# Altium PCB ECGAquisitionBoard.PcbDoc
Units mil, origin at the board's own origin, x right, y up, seen from the top; angles counter-clockwise.
Board outline 6000 x 4000 mil, 2 copper layers (Top Layer, Bottom Layer); 48 components, 29 nets, 139 pads, 0 vias.
Unrouted connection lines stored in the file: 92.
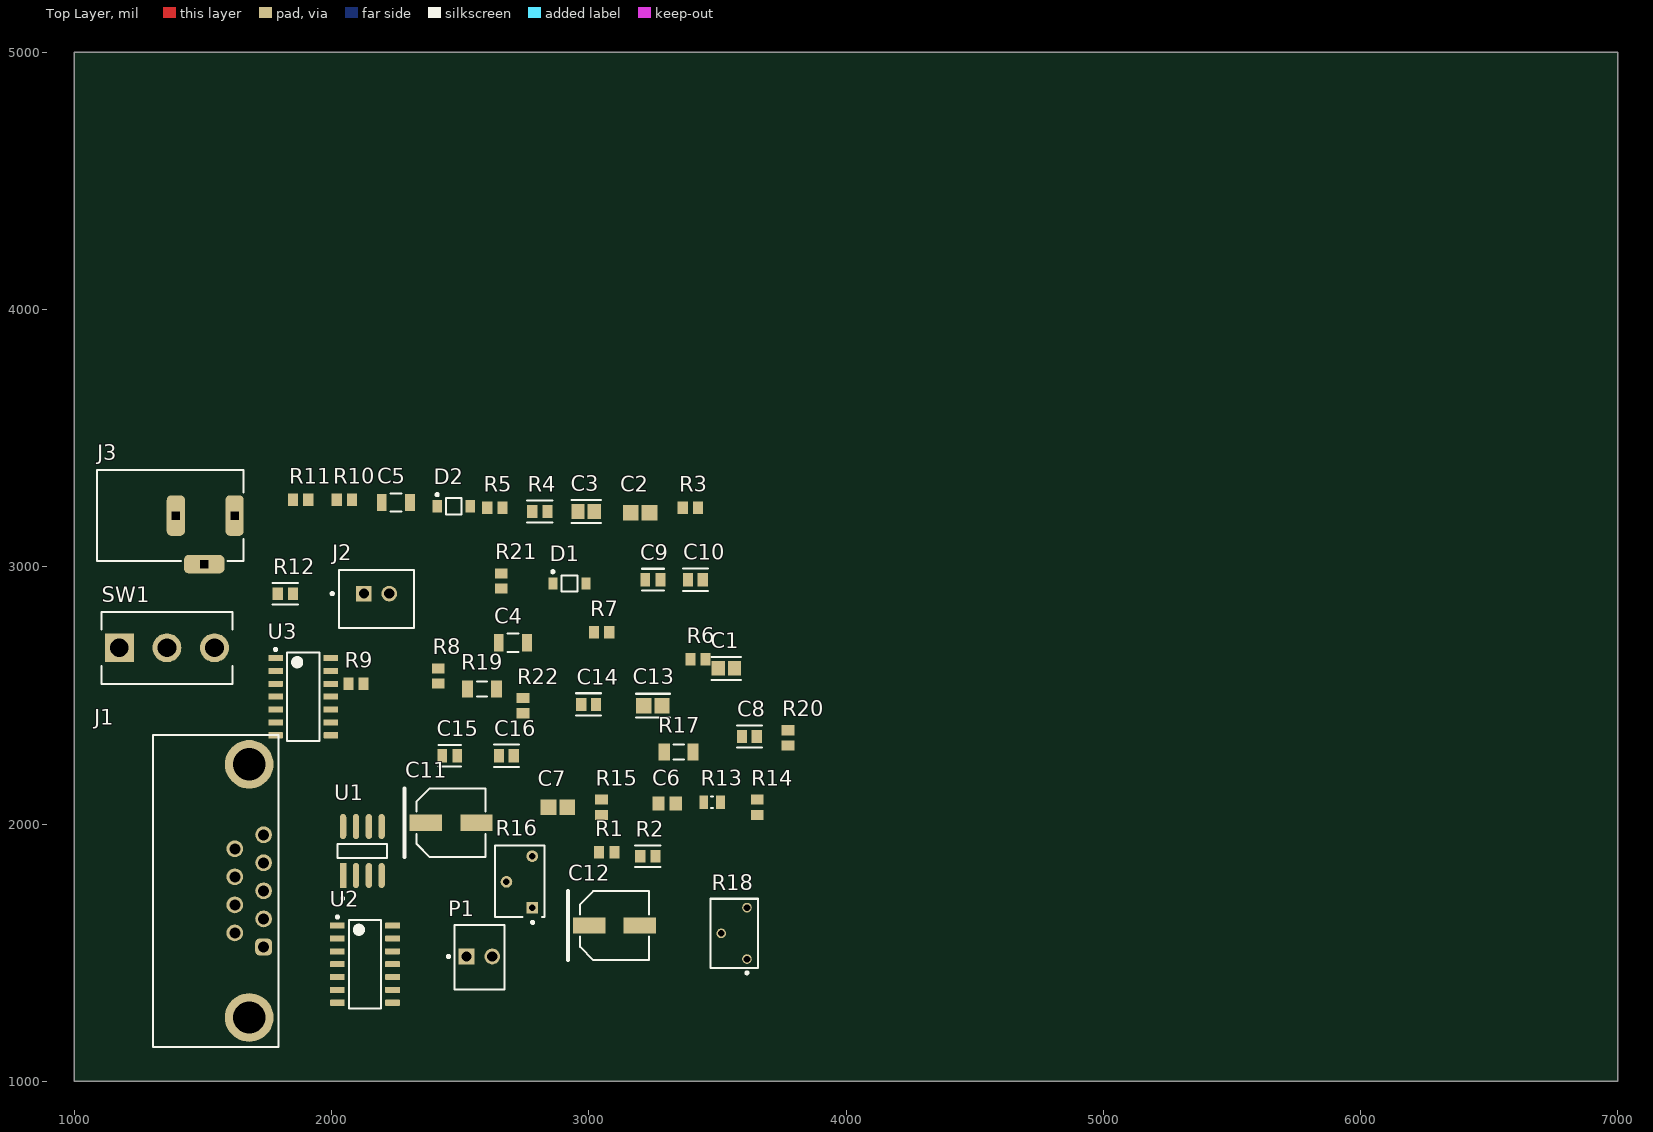
[diagram p0: Top Layer view]
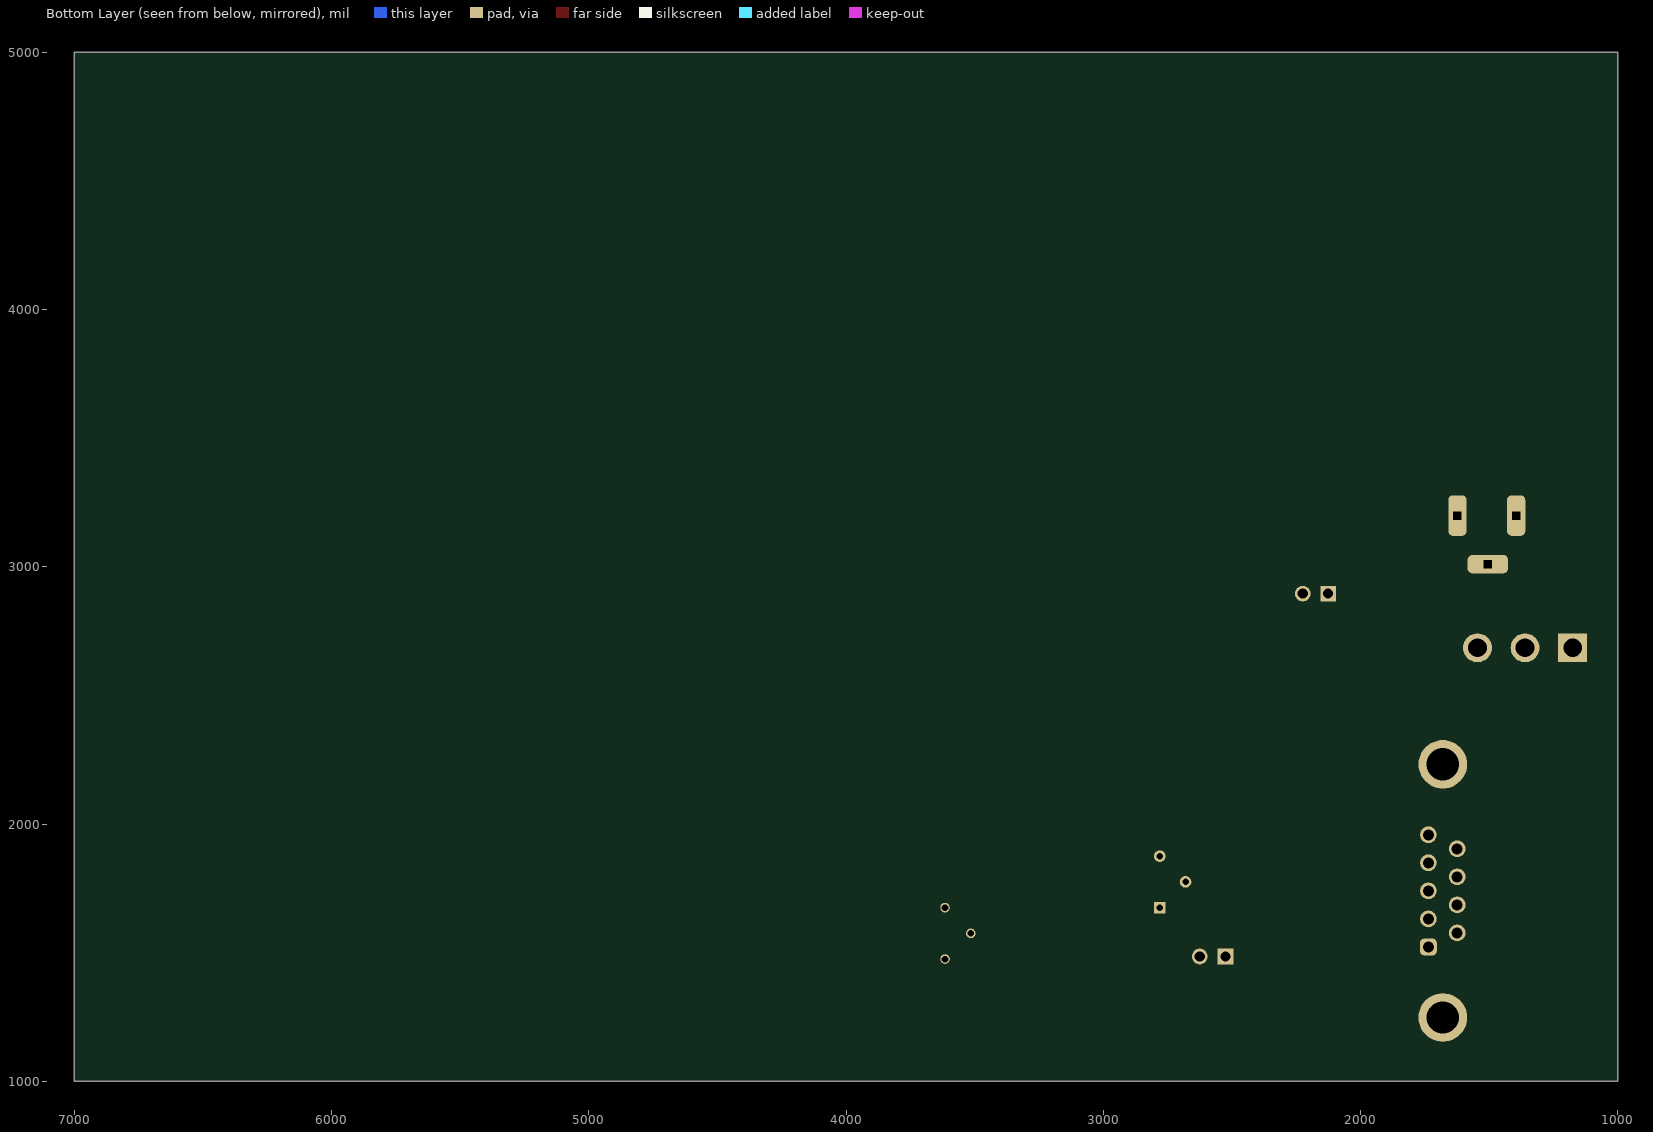
[diagram p1: Bottom Layer view, seen from below]

## Layer stack, top to bottom
Top Solder: solder mask 0.4, Solder Resist, Dk 3.5
Top Layer: signal copper 1.4
Dielectric 1: dielectric 12.6, FR-4, Dk 4.8
Bottom Layer: signal copper 1.4
Bottom Solder: solder mask 0.4, Solder Resist, Dk 3.5

## Board outline
1000,1000 7000,1000 7000,5000 1000,5000

## Design rules (kind name [scope] priority, off if disabled: settings)
Clearance [All] p1: gap=10 ignorepadtopadclearanceinfootprint=FALSE except(0: Arc-Hole Track-Hole SMDPad-Hole THPad-Hole Via-Hole Fill-Hole Poly-Hole Region-Hole Text-Hole)
PolygonConnect [All] p1: connectstyle=Relief reliefconductorwidth=10 reliefentries=4 polygonreliefangle="90 Angle" airgapwidth=10
RoomDefinition ECGAquisitionBoard [InComponentClass('ECGAquisitionBoard')] p1: confinementstyle=ConfineIn formatcopy=TRUE lockcomponents=FALSE outline 7045,1055 19870,1055 19870,2405 7045,2405
RoutingVias [All] p1: holewidth=28 width=50 viastyle="Through Hole" minholewidth=28 minwidth=50 maxholewidth=28 maxwidth=50
SolderMaskExpansion [All] p1: expansion=4 istentingtop=FALSE
Width [All] p1: maxlimit=10 minlimit=10 preferedwidth=10
30 further rules are at their usual default settings.

## Classes and differential pairs
component class ECGAquisitionBoard: C1 C2 C3 C4 C5 C6 C7 C8 C9 C11 C12 C16 D1 D2 J1 J3 P1 R1 R2 R3 R5 R7 R8 R9 R11 R12 R13 R14 R15 R16 R17 R18 R21 SW1 U1

## Components (designator, comment, footprint, x,y, rotation, side; value= is the part's Value field where it differs from the comment)
C1 "100p 1%" FP-0805-L_2_01_0_2-W_1_25-IPC_B 3535,2605 r0 top
C2 "4.7n 1%" CAPC2013X94X50ML20T25 3200,3210 r0 top
C3 "100p 1%" FP-0805-L_2_01_0_2-W_1_25-IPC_B 2990,3215 r0 top
C4 "47n 1%" FP-C1206C-EB-MFG 2705,2705 r0 top value="47,000 pF"
C5 "47n 1%" FP-C1206C-EB-MFG 2250,3250 r0 top value="47,000 pF"
C6 "2n 5% 50V" CAPC2013X70X45NL10T25 3304.53,2080 r0 top
C7 "4.7n 1%" CAPC2013X94X50ML20T25 2879.53,2065 r0 top
C8 "10u 25V" FP-GRM21B-0_15-IPC_C 3624.53,2340 r0 top
C9 "100n 25V" FP-C0805C-DN-MFG 3249.53,2950 r0 top value="0.10 μF"
C10 "10u 25V" FP-GRM21B-0_15-IPC_C 3414.53,2950 r0 top
C11 "100u 25V" PNSC-FK-V-D8_V 2465,2005 r0 top
C12 "100u 25V" PNSC-FK-V-D8_V 3100,1605 r0 top
C13 "10n 200V" FP-0805-L_2_01_0_2-W_1_25-IPC_A 3249.53,2460 r0 top
C14 "10u 25V" FP-GRM21B-0_15-IPC_C 2999.53,2465 r0 top
C15 "100n 25V" FP-C0805C-DN-MFG 2459.53,2265 r0 top value="0.10 μF"
C16 "10u 25V" FP-GRM21B-0_15-IPC_C 2679.53,2265 r0 top
D1 "3V3" ONSC-SOD-123-2-425-04_V 2925,2935 r0 top
D2 "3V3" ONSC-SOD-123-2-425-04_V 2475,3235 r0 top
J1 "618009231121" 618009231121 1550,1740 r270 top
J2 "B2B-XH-A(LF)(SN)" FP-B2B-XH-A_LF_SN-MFG 2175,2875 r0 top
J3 "694108301002" 694108301002 1373.11,3198.98 r270 top
P1 "22-23-2021" MOLX-22-23-2021_V 2575,1485 r0 top
R1 "100k 0.1%" RESC2013X60X40LL20T25_A 3070,1890 r0 top
R2 "1k 0.1%" FP-ERA6A-IPC_C 3230,1875 r0 top
R3 "10k 0.1% 0.125W" RESC2013X60X40LL20T25_A 3395,3230 r0 top
R4 "1k 0.1%" FP-ERA6A-IPC_C 2810,3215 r0 top
R5 "100k 0.1%" RESC2013X60X40LL20T25_A 2635,3230 r0 top
R6 "100k 0.1%" RESC2013X60X40LL20T25_A 3424.53,2640 r0 top
R7 "100k 0.1%" RESC2013X60X40LL20T25_A 3050,2745 r0 top
R8 "10k 0.1% 0.125W" RESC2013X60X40LL20T25_A 2415,2575.47 r90 top
R9 "100k 0.1% 0.125W" RESC2013X60X40LL20T25_A 2095,2545 r0 top
R10 "10k 0.1% 0.125W" RESC2013X60X40LL20T25_A 2050,3260 r0 top
R11 "10k 0.1% 0.125W" RESC2013X60X40LL20T25_A 1880,3260 r0 top
R12 "1k 0.1%" FP-ERA6A-IPC_C 1820.44,2895 r0 top
R13 "10M 5% 0.125W" RESC2013X50X30LL20T20 3479.53,2085 r0 top
R14 "10k 0.1% 0.125W" RESC2013X60X40LL20T25_A 3654.53,2065 r90 top
R15 "10k 0.1% 0.125W" RESC2013X60X40LL20T25_A 3049.53,2065 r90 top
R16 "10k" FP-3266W-MFG 2731.57,1777.17 r90 top value=10kΩ
R17 "1M 1% 0.125W" RESC3216X70X50NL05T20 3349.53,2280 r0 top
R18 "100k" BOUR-3266W-3_V 3565,1575 r90 top
R19 "1M 1% 0.125W" RESC3216X70X50NL05T20 2585,2525 r0 top
R20 "100k 0.1%" RESC2013X60X40LL20T25_A 3774.53,2335 r90 top
R21 "1k 0.1%" RESC2013X60X40LL20T25_A 2659.53,2945 r90 top
R22 "100k 0.1%" RESC2013X60X40LL20T25_A 2744.53,2460 r90 top
SW1 "A101SYCB04" FP-A101SYCB04-MFG 1360,2685 r90 top
U1 "AD620BRZ-RL" FP-R-8-IPC_A 2120,1895 r90 top
U2 "TL084CDR" D0014A_N 2130,1455 r0 top
U3 "TL084CDR" D0014A_N 1890,2495 r0 top

## Footprints (in the part's own frame and the unit in brackets; to place one, negate y for a bottom-side part, rotate by r counter-clockwise, add the part's x,y. Pads: shape width x height; smd on the part's side, far side on the other; paste and mask are expansions set on the pad)
618009231121 [mm] "9 pins, right angled, 8.08mm, with hex screw"
  rrect50% 1.65x1.65 hole 1.09: 1(5.54,4.72)
  round 1.65 hole 1.09: 2(2.77,4.72) 3(0,4.72) 4(-2.77,4.72) 5(-5.54,4.72) 6(4.155,1.88) 7(1.385,1.88) 8(-1.385,1.88) 9(-4.155,1.88)
  round 4.8 hole 3.2: M1(-12.5,3.3) M2(12.5,3.3)
  silkscreen extent -15.4,-6.2 15.4,6.2, body extent -15.4,-12.2 15.4,6.2, height 12.55
694108301002 [mm] "DC Power Jack Right Angled(6.4)"
  rrect50% 4x1.8 hole 0.8 square: 1(0,6.35) 2(0,0.55)
  rrect50% 1.8x4 hole 0.8 square: 3(4.8,3.35)
  silkscreen extent -4.5,-7.25 4.5,7.25, body extent -4.5,-7.25 5,7.25, height 10.75
BOUR-3266W-3_V [mm] "THD, 3-Leads, Body 6.6x4.69mm, Pitch 2.54mm"
  round 0.95 hole 0.65: 1(-2.54,-1.27) 2(0,1.27) 3(2.54,-1.27)
  silkscreen extent -4.02,-2.34 3.41,2.34, body extent -3.3,-2.35 3.3,2.35, height 8.51
CAPC2013X70X45NL10T25 [mm] "Chip Capacitor, 2-Leads, Body 2.00x1.25mm, IPC Medium Density"
  rect 1.2x1.4 smd: 1(-0.85,0) 2(0.85,0)
  body extent -1.05,-0.67 1.05,0.67, height 0.7
CAPC2013X94X50ML20T25 [mm] "Chip Capacitor, 2-Leads, Body 2.01x1.25mm, IPC Low Density"
  rect 1.55x1.55 smd: 1(-0.925,0) 2(0.925,0)
  body extent -1.1,-0.72 1.11,0.72, height 0.94
D0014A_N [mm] "SOIC, 14-Leads, Body 8.75x4mm, Pitch 1.27mm, IPC Medium Density"
  rrect17% 1.45x0.6 smd: 1(-2.725,3.81) 2(-2.725,2.54) 3(-2.725,1.27) 4(-2.725,0) 5(-2.725,-1.27) 6(-2.725,-2.54) 7(-2.725,-3.81) 8(2.725,-3.81) 9(2.725,-2.54) 10(2.725,-1.27) 11(2.725,0) 12(2.725,1.27) 13(2.725,2.54) 14(2.725,3.81)
  silkscreen extent -2.85,-4.37 1.6,4.78, body extent -3.02,-4.32 3.02,4.32, height 1.59
FP-0805-L_2_01_0_2-W_1_25-IPC_A [mil]
  rect 59.24x61.27 smd paste+0 mask+0: 1(-35.66,0) 2(35.66,0)
  silkscreen extent -65,-46 65,46, body extent -85,-50 85,50, height 10
FP-0805-L_2_01_0_2-W_1_25-IPC_B [mil]
  rect 51.36x57.33 smd paste+0 mask+0: 1(-31.72,0) 2(31.72,0)
  silkscreen extent -57,-44 57,44, body extent -67,-39 67,39, height 10
FP-3266W-MFG [mm]
  rect 1.15x1.15 hole 0.65 paste-1000 mask+0: 1(-2.595,-1.23)
  round 1.15 hole 0.65 paste-1000 mask+0: 2(-0.055,1.31) 3(2.485,-1.23)
  silkscreen extent -4.17,-2.44 3.54,2.44, body extent -3.64,-2.54 3.64,2.54, height 0.25
FP-A101SYCB04-MFG [mil]
  rect 112.37x112.37 hole 73 paste-39370.1 mask+0: 1(0,185)
  round 112.37 hole 73 paste-39370.1 mask+0: 2(0,0) 3(0,-185)
  silkscreen extent -140,-255 140,255, body extent -144,-259 144,259, height 10
FP-B2B-XH-A_LF_SN-MFG [mm]
  rect 1.55x1.55 hole 1 paste-1000 mask+0: 1(-1.25,0.525)
  round 1.55 hole 1 paste-1000 mask+0: 2(1.25,0.525)
  silkscreen extent -4.5,-2.87 3.7,2.88, body extent -3.8,-2.98 3.8,2.98, height 0.25
FP-C0805C-DN-MFG [mm]
  rect 0.95x1.35 smd paste+0 mask+0: 1(-0.75,0) 2(0.75,0)
  silkscreen extent -1.1,-1.07 1.1,1.07, body extent -1.4,-0.85 1.4,0.85, height 0.25
FP-C1206C-EB-MFG [mm]
  rect 0.95x1.7 smd paste+0 mask+0: 1(-1.4,0) 2(1.4,0)
  silkscreen extent -0.55,-0.9 0.55,0.9, body extent -2,-1 2,1, height 0.25
FP-ERA6A-IPC_C [mil]
  rect 39.55x49.69 smd paste+0 mask+0: 1(-29.56,0) 2(29.56,0)
  silkscreen extent -49,-42 49,42, body extent -53,-31 53,31, height 10
FP-GRM21B-0_15-IPC_C [mil]
  rect 39.6x51.5 smd paste+0 mask+0: 1(-28.59,0) 2(28.59,0)
  silkscreen extent -48,-43 48,43, body extent -52,-31 52,31, height 10
FP-R-8-IPC_A [mil]
  rect 97.4x24.49 smd paste+0 mask+0: 1(-95.12,75)
  rrect100% 97.4x24.49 smd paste+0 mask+0: 2(-95.12,25) 3(-95.12,-25) 4(-95.12,-75) 5(95.12,-75) 6(95.12,-25) 7(95.12,25) 8(95.12,75)
  silkscreen extent -189,-96 27,96, body extent -164,-116 164,116, height 10
MOLX-22-23-2021_V [mm] "THD, 2-Leads, Body 6.35x4.93mm, Pitch 2.54mm"
  rect 1.55x1.55 hole 1.02: 1(-1.27,0)
  round 1.55 hole 1.02: 2(1.27,0)
  silkscreen extent -3.19,-3.25 2.47,3.1, body extent -2.46,-3.25 2.46,3.1, height 10.66
ONSC-SOD-123-2-425-04_V [mm] "SOD, 2-Leads, Body 2.69x1.6mm"
  rect 0.91x1.22 smd: 1(-1.635,0) 2(1.635,0)
  silkscreen extent -1.76,-0.8 0.78,1.28, body extent -1.35,-0.8 1.35,0.8, height 1.35
PNSC-FK-V-D8_V [mm] "CAPAE, 2-Leads, Body 6.80x6.80mm"
  rect 3.2x1.6 smd: 1(-2.5,0) 2(2.5,0)
  silkscreen extent -4.6,-3.4 3.4,3.4, body extent -3.9,-3.4 3.9,3.4, height 8
RESC2013X50X30LL20T20 [mm] "Chip Resistor, 2-Leads, Body 2.00x1.25mm, IPC High Density"
  rect 0.85x1.35 smd: 1(-0.825,0) 2(0.825,0)
  silkscreen extent -0.1,-0.58 0.1,0.58, body extent -1.1,-0.72 1.1,0.72, height 0.5
RESC2013X60X40LL20T25_A [mm] "Chip Resistor, 2-Leads, Body 2.20x1.35mm, IPC High Density"
  rect 1x1.25 smd: 1(-0.75,0) 2(0.75,0)
  body extent -1.1,-0.67 1.1,0.67, height 0.6
RESC3216X70X50NL05T20 [mm] "Chip Resistor, 2-Leads, Body 3.20x1.60mm, IPC Medium Density"
  rect 1.1x1.65 smd: 1(-1.425,0) 2(1.425,0)
  silkscreen extent -0.5,-0.73 0.5,0.73, body extent -1.63,-0.82 1.62,0.82, height 0.7

## Part data
C1 C3: library part CMP-2007-04119-2, "General Purpose Ceramic Capacitor, 0805, 100pF, 1%, C0G, 30ppm/°C, 100V", Capacitance=100pF, Case Code (Imperial)=0805, Case Code (Metric)=2012, Dielectric=C0G, Dielectric Material=Ceramic, Max Operating Temperature=125°C, Min Operating Temperature=-55°C, Package Quantity=1, Tolerance=1%, Voltage=100V, Case/Package=0805, Construction=Flat, Depth=1.25mm, Height=0.71mm, Lead Free="Lead Free", Length=2.01mm, Mount="Surface Mount", Number of Pins=2, Packaging="Tape and Reel", Radiation Hardening=No, REACH SVHC="No SVHC", RoHS Compliant=Yes, Series=-, Termination=SMD/SMT, Thickness=0.037inch, Voltage Rating=100V, Voltage Rating (DC)=100V, Width=1.25mm
C2 C7: library part CMP-1036-03569-3, Manufacturer="AVX Interconnect / Elco", Part Number=08053A472FAT2A
C4 C5: library part CMP-1037-03977-2, "CAP CER 0.047UF 50V NP0 1206", Capacitance="47,000 pF", Manufacturer=KEMET, Manufacturer Part Number=C1206C473F5GACTU, Package=C1206C-EB, Temperature="-55°C to +150°C", Temperature Characteristic=C0G, Temperature Coefficient=15%, Temperature Range High=+150°C, Temperature Range Low=-55°C, Tolerance=0.01, Voltage Rating="50 V", Automotive=Yes, Automotive Grade="Grade 0", Category=Cap, ComponentLink2Description=Datasheet, ComponentLink2URL=https://content.kemet.com/datasheets/KEM_C1007_X8R_ULTRA_150C_SMD.pdf, Device Class L1="Passive Components", Device Class L2=Capacitors, Device Class L3="Ceramic Capacitors", Digikey Description="CAP CER 0.047UF 50V NP0 1206", Height=0.88mm, Ipc Land Pattern Name=CAPC320160X78, Lead Free=Yes, Material=Ceramic, Mouser Description="Multilayer Ceramic Capacitors MLCC - SMD/SMT 50volts 0.047uF 1% C0G", Octopart=https://octopart.com/c1206c473f5gactu-kemet-13140371, RoHS=TRUE
C6: library part CMP-2007-00880-1, Manufacturer=Murata, Part Number=GRM2165C1H202JA01D
C8 C10 C14 C16: library part CMP-2007-03541-2, "Chip Multilayer Ceramic Capacitors for General Purpose, 0805, 10uF, X5R, 15%, 10%, 25V", Capacitance=10uF, Case Code (Imperial)=0805, Case Code (Metric)=2012, Dielectric=X5R, Max Operating Temperature=85°C, Min Operating Temperature=-55°C, Package Quantity=1, Tolerance=10%, Voltage=25V, Case/Package=0805, Depth=1.25mm, Height=1.25mm, Lead Free="Lead Free", Length=2mm, Material=Ceramic, Mount="Surface Mount", Packaging="Tape and Reel", Radiation Hardening=No, Termination=SMD/SMT, Thickness=0.053inch, Voltage Rating=25V, Voltage Rating (DC)=25V, Width=0.049inch
C9 C15: library part CMP-2007-00282-2, "CAP CER 0.1UF 25V 20% X7R 0805", Capacitance="0.10 μF", Manufacturer=KEMET, Manufacturer Part Number=C0805C104M3RACTU, Package=C0805C-DN, Temperature="-55°C to +125°C", Temperature Characteristic=X7R, Temperature Coefficient=30ppm/°C, Temperature Range High=+125°C, Temperature Range Low=-55°C, Tolerance=0.2, Voltage Rating="25 V", Automotive=No, Category=Cap, ComponentLink2Description=Datasheet, ComponentLink2URL=https://content.kemet.com/datasheets/KEM_C1003_C0G_SMD.pdf, Device Class L1="Passive Components", Device Class L2=Capacitors, Device Class L3="Ceramic Capacitors", Digikey Description="CAP CER 0.1UF 25V 20% X7R 0805", Height=0.88mm, Ipc Land Pattern Name=CAPC200125X78, Lead Free=Yes, Material=Ceramic, Mouser Description="Multilayer Ceramic Capacitors MLCC - SMD/SMT 25volts 0.1uF X7R 20%", Octopart=https://octopart.com/c0805c104m3ractu-kemet-9138612, RoHS=TRUE
C11 C12: library part CMP-2000-06206-1, "Aluminum Electrolytic Capacitor, 100 uF, +/- 20%, 25 V, 2-Pin SMD (Size Code D8), -55 to 105 degC, RoHS, Tape and Reel", Capacitance=100µF, Case Size/Dimension=Ø6.3x7.7mm, Lifetime@Temperature=2000Hrs@105°C, Manufacturer=Panasonic, Operating Temp Range=-55to+105°C, Operating Temp-Max=105°C, Package Description="2-Pin Electrolytic Aluminum Capacitor, Body 6.6 x 6.6 mm", Package Reference=FK-V-D8, Rated Voltage=25V, Ripple Current=280mA, Datasheet URL=http://industrial.panasonic.com/cdbs/www-data/pdf/RDE0000/ABA0000C1181.pdf, Datasheet Version=03/2016, Impedance=0.34O, Manufacturer URL=http://www.panasonic.com/, Mounting Technology=SurfaceMount, Package URL=http://industrial.panasonic.com/cdbs/www-data/pdf/RDE0000/DME0000COL48.pdf, Series=FK, Type=Can
C13: library part CMP-2007-04596-2, "General Purpose Ceramic Capacitor, 0805, 10nF, 10%, X7R, 0.15, 200V", Capacitance=10nF, Case Code (Imperial)=0805, Case Code (Metric)=2012, Dielectric=X7R, Dielectric Material=Ceramic, Max Operating Temperature=125°C, Min Operating Temperature=-55°C, Package Quantity=1, Tolerance=10%, Voltage=200V, Case/Package=0805, Contact Plating=Tin, Depth=1.25mm, Dissipation Factor=2.5%, Height=0.94mm, Lead Free="Lead Free", Lead Pitch=5.08mm, Length=2.01mm, Mount="Surface Mount", Number of Pins=2, Packaging="Tape and Reel", Radiation Hardening=No, REACH SVHC="No SVHC", RoHS Compliant=Yes, Termination=SMD/SMT, Thickness=0.037inch, Voltage Rating=200V, Voltage Rating (DC)=200V, Width=0.049inch
D1 D2: library part CMP-1060-00363-1, "Zener Voltage Regulator, 500 mW, 2-Pin SOD-123, Pb-Free, Tape and Reel", Manufacturer="On Semiconductor", PartNumber=MMSZ5226BT1G, ComponentLink1Description="Manufacturer URL", ComponentLink1URL=http://www.onsemi.com/, ComponentLink2Description=Datasheet, ComponentLink2URL=http://www.onsemi.com/pub_link/Collateral/MMSZ5221BT1-D.PDF, ComponentLink3Description="Package Specification", ComponentLink3URL=http://www.onsemi.com/pub_link/Collateral/425-04.PDF, DatasheetVersion="Rev. 12", Mounting Technology="Surface Mount", P Max (W)=0.5, PackageDescription="2-Pin SOD, Body 1.6 x 2.69 mm", PackageReference=SOD-123-2-425-04, PackageVersion="Rev. G, 10/2009", Packing="Tape and Reel", RoHS=Pb-Free, VZ Typ (V)=3.3
J1: library part CMP-1502-00200-2, Contact Resistance=30mΩ, Current Rating=3A, Insulation Resistance=5GΩ, Max Operating Temperature=105°C, Min Operating Temperature=-55°C, Operating Supply Voltage=125V, Contact Material="Gold, Nickel", Contact Plating=Gold, Depth=18.5mm, Gender=Female, Height=12.7mm, Housing Material=Steel, Insulation Material=PBT, Length=30.8mm, Mount="Through Hole", NexarPartId=18818187, Number of Contacts=9, Number of Pins=9, Number of Rows=2, Orientation="Right Angle", Pitch=2.77mm, REACH SVHC=Unknown, RoHS=Compliant, Termination=SMD/SMT, Voltage Rating=125V, Width=12.5mm
J2: library part CMP-2000-05888-3, "CONN HEADER VERT 2POS 2.5MM", Color=Natural, Contact Resistance=20mR, Current Rating=3A, Housing Color=White, Insulation Resistance=1GR, Max Operating Temperature=85°C, Max Voltage Rating (AC)=250V, Min Operating Temperature=-25°C, Connector Type="Male Pin", Contact Material=Brass, Contact Plating=Tin, Contact Type="Male Pin", Depth=5.75mm, Fastening Type=Detent, Housing Material=Polyamide, Lead Free="Lead Free", Lead Pitch=2.5mm, Length=7.4mm, Max Current Rating=3A, Max Voltage Rating (DC)=250V, Mount="Through Hole", Number of Contacts=2, Number of Positions=2, Number of Rows=1, Orientation=Straight, Packaging=Bulk, Pitch=2.5mm, REACH SVHC="No SVHC", Series=XH, Termination=Solder, Voltage Rating=250V, Voltage Rating (AC)=250V, Wire/Cable Gauge=22AWG
J3: library part CMP-1502-00190-3, Color=Black, Current Rating=5A, Flammability Rating="UL94 V-0", Insulation Resistance=100MΩ, Max Operating Temperature=85°C, Min Operating Temperature=-40°C, Operating Supply Voltage=24V, Voltage Rating (DC)=20V, Connector Type=Power, Contact Gender=Female, Contact Material="Gold, Tin", Contact Plating=Tin, Gender=Male, Height=11mm, Housing Material=Polyamide, Mount="Through Hole", NexarPartId=52676102, Number of Contacts=3, Packaging=Bulk, REACH SVHC=Unknown, RoHS=Compliant, Shielding=Unshielded, Termination="Through Hole", Voltage Rating=24V
P1: library part CMP-1704-00001-3, "Male Header, Pitch 2.54 mm, 1 x 2 Position, Height 10.67 mm, Tail Length 3.56 mm, 0 to 75 degC, RoHS, Bulk", Max Operating Temperature="75 degC", Min Operating Temperature="0 degC", Package Quantity=3000, ComponentLink1Description="Manufacturer URL", ComponentLink1URL=http://www.molex.com/, ComponentLink2Description=Datasheet, ComponentLink2URL=https://datasheet.ciiva.com/19454/232266-19454304.pdf, Height="10.67 mm", Length="5.08 mm", Mount="Through Hole", Mounting Technology="Through Hole", PackageDescription="Male Header, Pitch 2.54 mm, 1 x 2 Position, Height 10.67 mm, Tail Length 3.56 mm", Packaging=Bulk, PartNumber=22-23-2021, Pins=2, Radiation Hardening=No, REACH SVHC=Unknown, RoHSCompliant=True, Width="6.35 mm"
R1 R3 R5 R6 R7 R8 R9 R10 R11 R14 R15 R20 R21 R22: library part CMP-2001-00582-2, "Metal Film Chip Resistor, High Reliability Type, 0.125 W, +/- 0.1%, -55 to 155 degC, 0805 (2012 Metric), RoHS, Tape and Reel", Case Code - in=0805, Case Code - mm=2012, Manufacturer=Panasonic, Operating Temperature Range=-55Cto+155C, Package / Case=0805(2012metric), Package Description="2-Pin Surface Mount Device, Body 2 x 1.25 mm", Power Rating=125mW(1/8W), Resistance=10kOhms, Temperature Coefficient=25PPM/C, Tolerance=0.1%, Voltage Rating=100V, Brand=Panasonic, Datasheet URL=https://industrial.panasonic.com/cdbs/www-data/pdf/RDM0000/AOA0000C307.pdf, Datasheet Version=02/2016, Factory Pack Quantity=5000, Height=0.5mm, Length=2mm, Manufacturer URL=http://www.panasonic.com/, Mounting Technology=SurfaceMount, Package Reference=0805, Packaging=Reel, Product=ThinFilmResistorsSMD, Product Category=ThinFilmResistors-SMD, RoHS=Details, Series=ERA-6A, Termination Style=SMD/SMT, Type=MetalFilmChipResistors, Width=1.25mm
R2 R4 R12: library part CMP-2001-00581-2, "RES 1K OHM 0.1% 1/8W 0805", Case Code (Imperial)=0805, Case Code (Metric)=2012, Max Operating Temperature=155°C, Max Power Dissipation=125mW, Min Operating Temperature=-55°C, Package Quantity=5000, Resistance=1kR, Resistance Tolerance=0.1%, Resistor Type="Thin Film", Temperature Coefficient=25ppm/°C, Voltage Rating=100V, Case/Package=0805, Construction=Rectangular, Contact Plating=Tin, Depth=1.25mm, Height=0.5mm, Length=2mm, Military Standard=Not, Mount="Surface Mount", Number of Pins=2, Number of Terminations=2, Packaging="Tape and Reel", Power Rating=125mW, Radiation Hardening=No, REACH SVHC="No SVHC", RoHS Compliant=Yes, Series=ERA-6A, Technology="THIN FILM", Termination=SMD/SMT, Tolerance=0.1%, Width=1.25mm, Working Voltage=100V
R13: library part CMP-2001-04285-1, Manufacturer="Vishay Dale", Part Number=CRCW080510M0JNEA
R16: library part CMP-07234-000016-1, "TRIMMER 10K OHM 0.25W PC PIN TOP", Manufacturer=Bourns, Manufacturer Part Number=3266W-1-103LF, Package=3266W, Power Rating=0.25W, Resistance=10kΩ, Temperature="-55°C to +125°C", Temperature Coefficient=100ppm/°C, Temperature Range High=+125°C, Temperature Range Low=-55°C, Tolerance=10%, Automotive=No, Category=Res, ComponentLink2Description=Datasheet, ComponentLink2URL=https://www.bourns.com/docs/Product-Datasheets/3266.pdf, Composition=Cermet, Device Class L1="Passive Components", Device Class L2=Resistors, Device Class L3="Variable Resistors and Potentiometers", Digikey Description="TRIMMER 10K OHM 0.25W PC PIN TOP", Height=9.02mm, Lead Free=Yes, Mouser Description="Trimmer Resistors - Through Hole 1/4 10Kohms 10% SQ W/Standoff Sealed", Octopart=https://octopart.com/3266w-1-103lf-bourns-81445, RoHS=TRUE, Series=3266, Standoff Height=0.43mm
R17 R19: library part CMP-2003-00020-1, Manufacturer=Panasonic, Part Number=ERJ-8ENF1004V
R18: library part CMP-0975-00021-1, "Square Trimpot Trimming Potentiometer, 100 KOhm, 0.25 W, -55 to 125 degC, 3-Pin THD, RoHS, Tube", Manufacturer=Bourns, Operating Temperature="-55 to 125 degC", PartNumber=3266W-1-104LF, Power Rating@70 degC="0.25 W", Resistance="100 kOhm", Tolerance=+/-10%, ComponentLink1Description="Manufacturer URL", ComponentLink1URL=https://www.bourns.com/, ComponentLink2Description=Datasheet, ComponentLink2URL=https://www.bourns.com/data/global/pdfs/3266.pdf, ComponentLink3Description="Package Specification", ComponentLink3URL=https://www.bourns.com/data/global/pdfs/3266.pdf, DatasheetVersion=Apr-14, Mounting Technology="Through Hole", PackageDescription="3-Pin THD, Body 6.35 x 4.31 mm, Pitch 2.54 mm", Packing=Tube, RoHS=TRUE
SW1: library part CMP-03408-000017-1, "SWITCH TOGGLE SPDT 0.4VA 20V", Actuator Color=Chrome, Contact Current Rating=400mA, Contact Resistance=10mR, Flammability Rating="UL94 V-1", Insulation Resistance=30MR, Max Operating Temperature=85°C, Max Voltage Rating (AC)=20V, Min Operating Temperature=-30°C, Package Quantity=100, Power Rating=400mW, Actuator Length=10.41mm, Actuator Material=Phenolic, Actuator Type="Standard Round", Contact Material=Copper, Contact Plating=Gold, Depth=6.86mm, Electrical Life=6000Cycles, ELV=Compliant, Illumination Type=Non-Illuminated, Lead Free="Lead Free", Max Voltage Rating (DC)=20V, Mount=Panel, Number of Poles=1, Number of Positions=2, Orientation=Straight, Packaging=Bulk, Radiation Hardening=No, REACH SVHC="No SVHC", RoHS Compliant=Yes, Series="Gemini A", Switch Function=On-On, Termination="PC Pins", Throw Configuration=SPDT, Voltage Rating (AC)=20V, Voltage Rating (DC)=20V
U1: library part CMP-09116-000146-1, "IC INST AMP 1 CIRCUIT 8SOIC", Case/Package=SOIC, Input Bias Current=1nA, Input Offset Voltage (Vos)=30mV, Input Resistance=10GR, Max Dual Supply Voltage=18V, Max Operating Temperature=125°C, Max Power Dissipation=650mW, Min Dual Supply Voltage=2.3V, Min Operating Temperature=-55°C, Min Supply Voltage=4.6V, Nominal Supply Current=1.3mA, Output Current per Channel=18mA, Package Quantity=2500, -3db Bandwidth=1MHz, Amplifier Type="INSTRUMENTATION AMPLIFIER", Common Mode Rejection Ratio=93dB, Contact Plating=Tin, Lead Free="Contains Lead", Mount="Surface Mount", Number of Channels=1, Number of Circuits=1, Number of Elements=1, Number of Pins=8, Operating Supply Current=1.3mA, Operating Supply Voltage=18V, Packaging="Tape and Reel", Power Dissipation=650mW, Radiation Hardening=No, RoHS Compliant=Yes, Series=-, Slew Rate=1.2V/µs
U2 U3: library part CMP-0017-00129-2, "JFET-Input Operational Amplifier, 7 to 36 V, 0 to 70 degC, 14-pin SOIC (D14), Green (RoHS & no Sb/Br)", Manufacturer="Texas Instruments", Rating=Catalog, Total Supply Voltage(Max)(+5V is 5, +/-5V is 10)=36, Total Supply Voltage(Min)(+5V is 5, +/-5V is 10)=7, CMRR(Min)(dB)=70, Code_JEDEC=MS-012, ComponentLink1Description="Manufacturer URL", ComponentLink1URL=http://www.ti.com/, ComponentLink2Description=Datasheet, ComponentLink2URL=http://www.ti.com/lit/ds/symlink/tl084.pdf, ComponentLink3Description="Package Specification", ComponentLink3URL=http://www.ti.com/lit/ml/mpds177g/mpds177g.pdf, DatasheetVersion=SLOS081G, Eco-Plan="Green (RoHS & no Sb/Br)", GBW(Typ)(MHz)=3, IIB(Max)(pA)=400, Iq per channel(Max)(mA)=2.8, Mounting Technology="Surface Mount", Number of Channels=4, Offset Drift(Typ)(uV/C)=18, PackageDescription="14-Pin Plastic Small Outline, Body 8.65 x 3.90 mm, Pitch 1.27 mm", PackageReference=D0014A, PackageVersion="4040047-5/M, 06/2011", PartNumber=TL084CDR, Slew Rate(Typ)(V/us)=13, Sub Family="General Purpose Amplifier, High Supply Voltage Amplifier (>=30V)", Vio (25C)(Max)(mV)=15, Vn at 1kHz(Typ)(nV/rtHz)=18

## Nets (pads, with @x,y where several pads share a name; then routed paths per layer and width w, separated by ;. In a path a pad name is that pad's centre, name@x,y a point inside that pad or via, vN(x,y) a via of type N, cw(c..) or ccw(c..) an arc to the next point about the centre after c; other vN are vias at no path point)
+4V5: C8.1 C9.1 C10.1 C11.1 C12.1 C13.1 R16.3 R18.1 R18.2 R20.2 SW1.1 U1.7 U2.11 U3.11
-4V5: C11.2 C12.2 C13.2 C14.2 C15.2 C16.2 J3.2 J3.3 R22.1 U1.4 U2.4 U3.4
GND: C1.2 C3.1 C4.2 C5.2 C9.2 C10.2 C15.1 C16.1 D1.1 D2.1 R14.1 R16.1 R19.1 R21.1 U1.5 U2.3 U3.2
NetC1_1: C1.1 C2.2 R1.1 U1.3
NetC2_1: C2.1 C3.2 R5.1 U1.2
NetC4_1: C4.1 D1.2 J2.2 R3.1
NetC5_1: C5.1 D2.2 J2.1 R8.1
NetC6_1: C6.1 R9.1 R13.1 U2.1
NetC6_2: C6.2 R15.2
NetC7_1: C7.1 R17.2 U2.13
NetC7_2: C7.2 R11.1 U2.14
NetC8_2: C8.2 C14.1 R20.1 R22.2 U3.3
NetJ1_2: J1.2 P1.2
NetJ1_3: J1.3 R5.2
NetJ1_4: J1.4 R1.2
NetJ3_1: J3.1 SW1.2
NetP1_1: P1.1 R8.2 R9.2
NetR2_1: R2.1 U1.1
NetR2_2: R2.2 R4.2 U2.5
NetR3_2: R3.2 R6.1 R7.1 U2.8
NetR4_1: R4.1 U1.8
NetR6_2: R6.2 R11.2 R14.2 U2.9
NetR7_2: R7.2 R12.2 U2.12
NetR10_1: R10.1 U2.6 U2.7
NetR10_2: R10.2 R13.2 R15.1 U2.2
NetR12_1: R12.1 R16.2
NetR17_1: R17.1 R18.3 R19.2
NetR21_2: R21.2 U3.1
NetU1_6: U1.6 U2.10
pads on no net: J1.1 J1.5 J1.6 J1.7 J1.8 J1.9 J1.M1 J1.M2 SW1.3 U3.5 U3.6 U3.7 U3.8 U3.9 U3.10 U3.12 U3.13 U3.14

## Text inside footprints (layer, text, board x,y; h text height)
J1: Mechanical 2 "PCB Edge" at 1252.76,1724.25 h40 r270